# EAGLE board arduino_uno_with_ motor_driver (EAGLE 6.1)
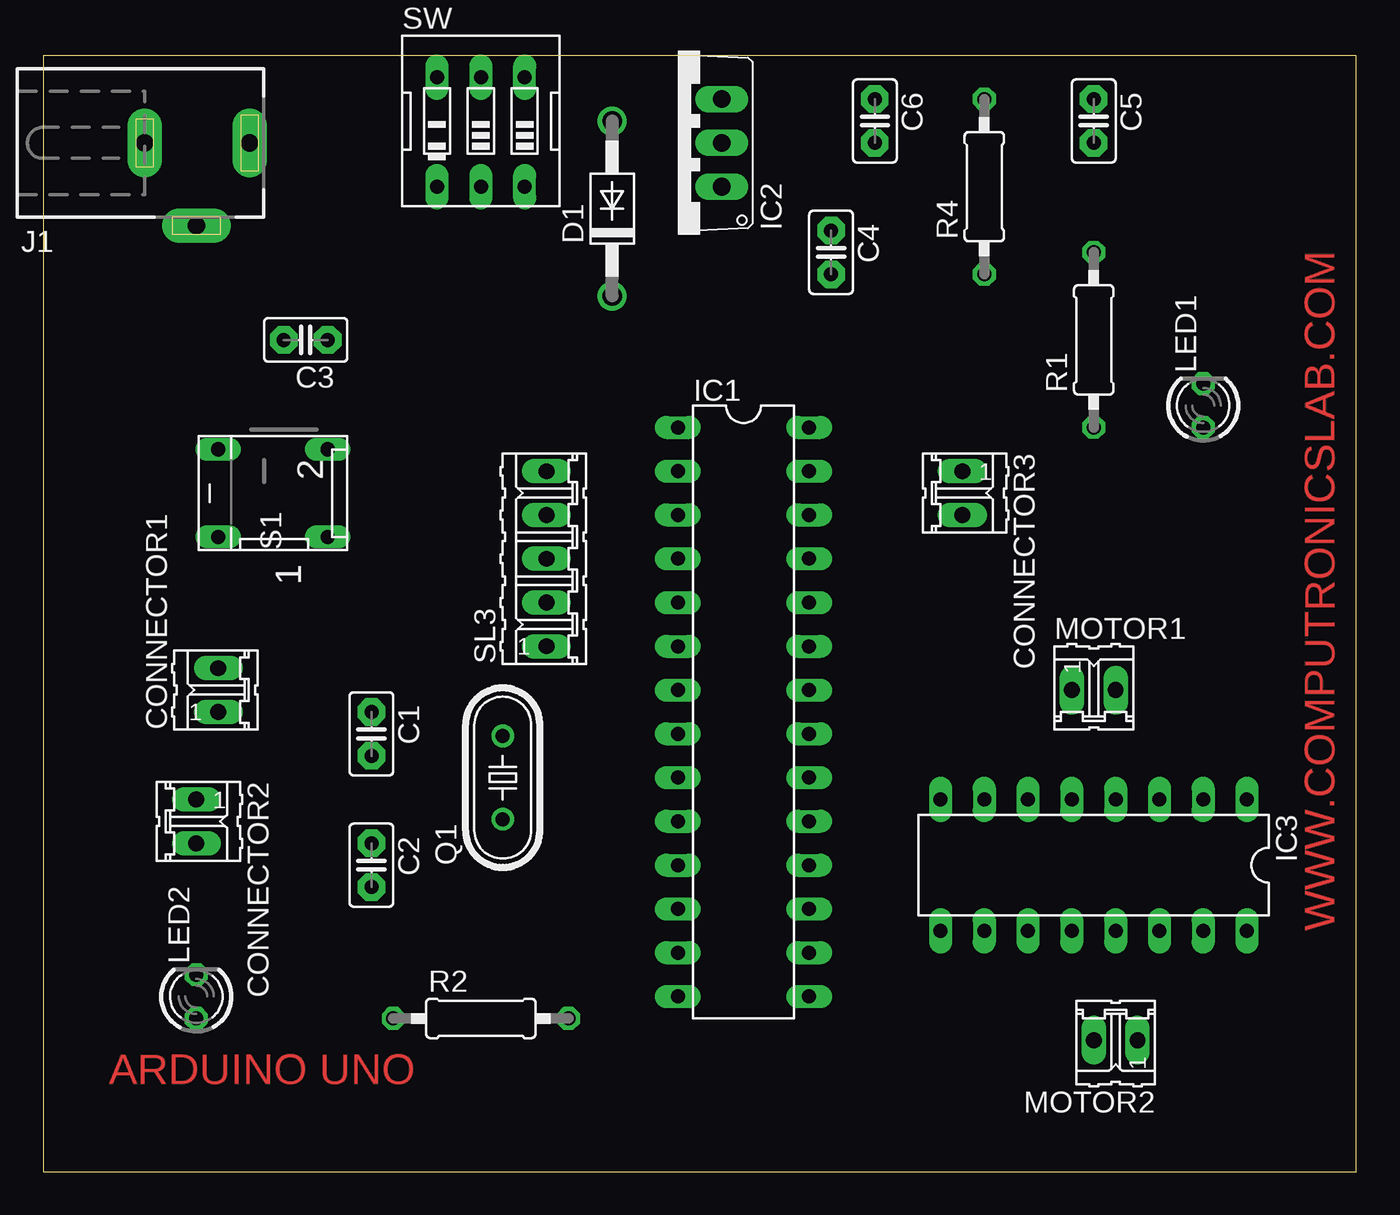
[diagram p0: board, top side]
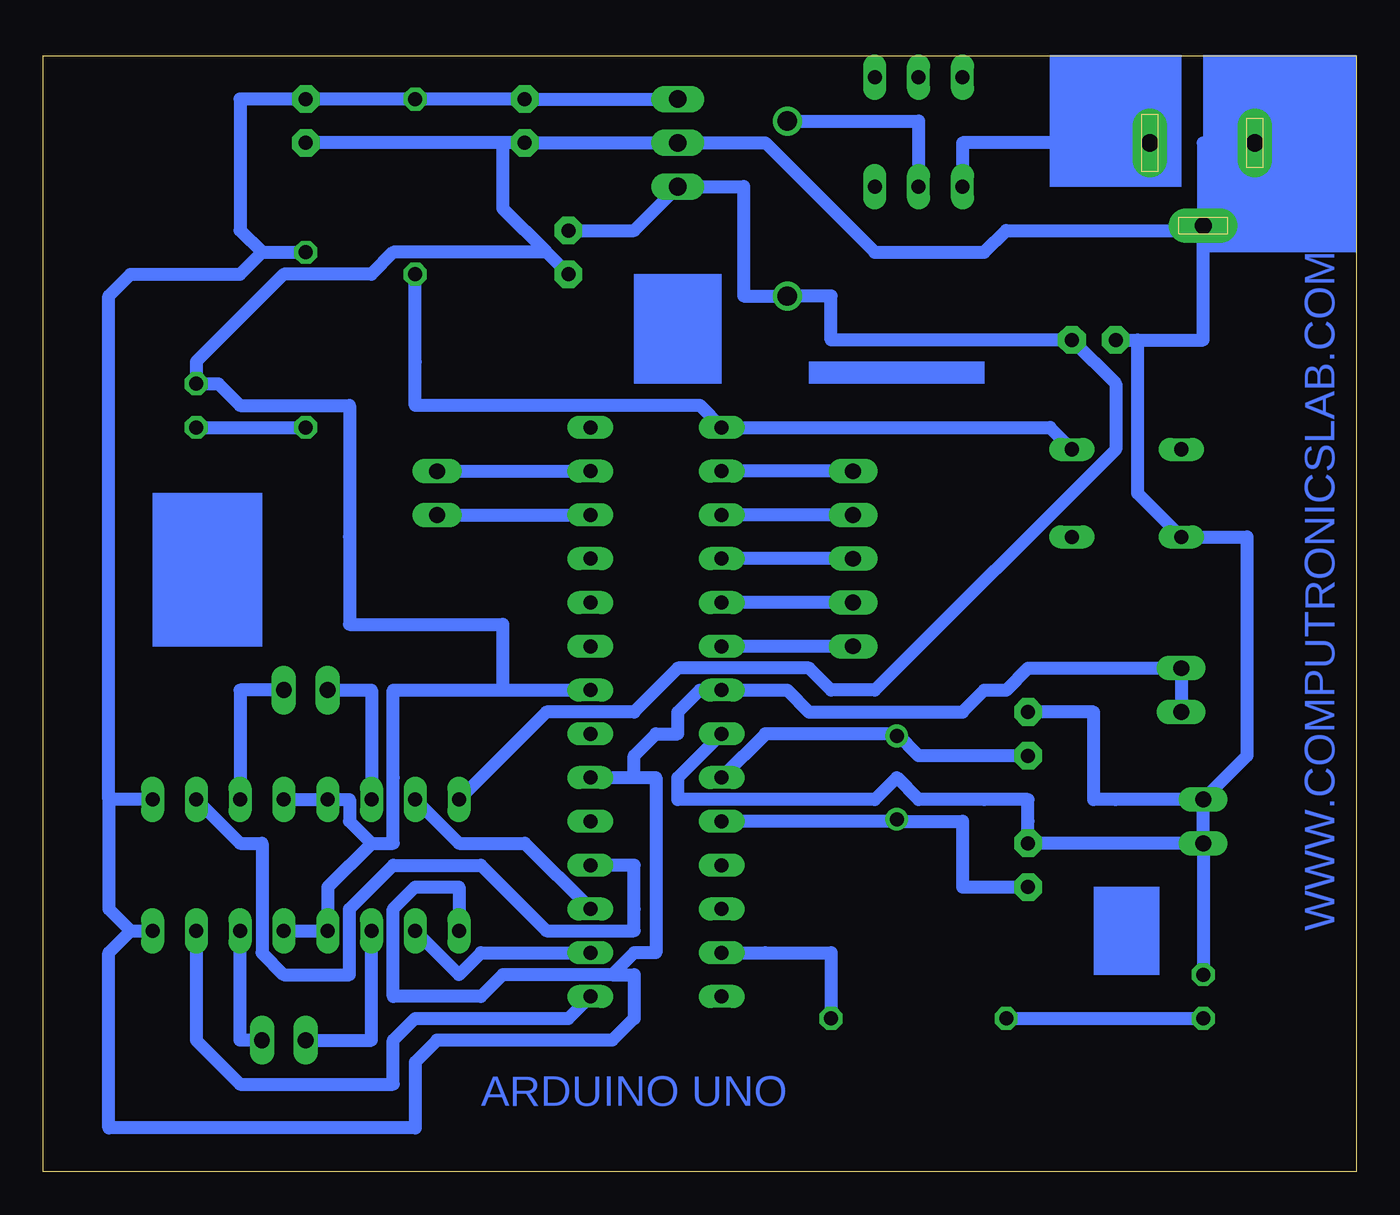
[diagram p1: board, bottom side, seen from below]

Size 76.2 x 64.76 mm. Coordinates in mm from the lower left corner, seen from the top.
Outline: 0,0 76.2,0 76.2,64.76 0,64.76 0,0
Copper layers (1*16): Top 0.035mm / dielectric 1.5mm / Bottom 0.035mm
Design rules: minimum track width 30mil, minimum drill 24mil, track to track 8mil, track to pad 8mil, pad to pad 8mil, via to via 8mil, smd to smd 8mil, copper to edge 40mil, drill to drill 8mil, minimum pad ring 10mil, minimum via ring 8mil, stop-mask expansion 4mil, vias tented up to drill 0mil, thermal gap 10mil

## Footprints (pad centres in the part's own frame; a part is rotated, then mirrored left to right if it is on the bottom)
C2.5-2 = drill 0.813 pad 1.6 octagon: 1 -1.27,0; 2 1.27,0
02P = drill 0.914 long: 1 -1.27,0; 2 1.27,0
DO41-10 = drill 1.118: A 5.08,0; C -5.08,0
DIL28-3 = drill 0.813 long: 1 -16.51,-3.81; 2 -13.97,-3.81; 3 -11.43,-3.81; 4 -8.89,-3.81; 5 -6.35,-3.81; 6 -3.81,-3.81; 7 -1.27,-3.81; 8 1.27,-3.81; 9 3.81,-3.81; 10 6.35,-3.81; 11 8.89,-3.81; 12 11.43,-3.81; 13 13.97,-3.81; 14 16.51,-3.81; 15 16.51,3.81; 16 13.97,3.81; 17 11.43,3.81; 18 8.89,3.81; 19 6.35,3.81; 20 3.81,3.81; 21 1.27,3.81; 22 -1.27,3.81; 23 -3.81,3.81; 24 -6.35,3.81; 25 -8.89,3.81; 26 -11.43,3.81; 27 -13.97,3.81; 28 -16.51,3.81
TO220V = drill 1.016 long: 1 -2.54,-2.54; 2 0,-2.54; 3 2.54,-2.54
DIL16 = drill 0.813 long: 1 -8.89,-3.81; 2 -6.35,-3.81; 3 -3.81,-3.81; 4 -1.27,-3.81; 5 1.27,-3.81; 6 3.81,-3.81; 7 6.35,-3.81; 8 8.89,-3.81; 9 8.89,3.81; 10 6.35,3.81; 11 3.81,3.81; 12 1.27,3.81; 13 -1.27,3.81; 14 -3.81,3.81; 15 -6.35,3.81; 16 -8.89,3.81
DCJ0303 = drill 1 pad 2 long: 1 0,3.1; 2 4.8,0; 3 0,-3
LED3MM = drill 0.813 octagon: A -1.27,0; K 1.27,0
HC49/S = drill 0.813: 1 -2.413,0; 2 2.413,0
0207/10 = drill 0.813 octagon: 1 -5.08,0; 2 5.08,0
DP-02 = drill 0.813 long: 1 -2.54,-2.54; 2 2.54,-2.54; 3 2.54,3.81; 4 -2.54,3.81
05P = drill 0.914 long: 1 -5.08,0; 2 -2.54,0; 3 0,0; 4 2.54,0; 5 5.08,0
EDG-03 = drill 0.813 long: 1 -2.54,-3.81; 2 0,-3.81; 3 2.54,-3.81; 4 2.54,2.54; 5 0,2.54; 6 -2.54,2.54

## Placement (x,y rotation side)
C1  22pf  [C2.5-2]  19.05,25.4 270 top
C2  22pf  [C2.5-2]  19.05,17.78 270 top
C3  100uF  [C2.5-2]  15.24,48.26 180 top
C4  0.1uf  [C2.5-2]  45.72,53.34 270 top
C5  0.1uf  [C2.5-2]  60.96,60.96 270 top
C6  4.7uf  [C2.5-2]  48.26,60.96 270 top
CONNECTOR1  2pin  [02P]  10.16,27.94 90 top
CONNECTOR2  2 pin  [02P]  8.89,20.32 270 top
CONNECTOR3  [02P]  53.34,39.37 270 top
D1  1N4007  [DO41-10]  33.02,55.88 90 top
IC1  ATMEGA328  [DIL28-3]  40.64,26.67 270 top
IC2  7805  [TO220V]  36.83,59.69 90 top
IC3  L293D  [DIL16]  60.96,17.78 180 top
J1  [DCJ0303]  8.89,59.69 270 top
LED1  3mm  [LED3MM]  67.31,44.45 90 top
LED2  3mm  [LED3MM]  8.89,10.16 90 top
MOTOR1  [02P]  60.96,27.94 0 top
MOTOR2  [02P]  62.23,7.62 180 top
Q1  16MHZ  [HC49/S]  26.67,22.86 90 top
R1  220R  [0207/10]  60.96,48.26 90 top
R2  330R  [0207/10]  25.4,8.89 0 top
R4  10K  [0207/10]  54.61,57.15 90 top
S1  push switch  [DP-02]  13.97,39.37 90 top
SL3  5 pin  [05P]  29.21,35.56 90 top
SW  on/of button  [EDG-03]  25.4,60.96 0 top

## Library data of the parts
C1-C6 = capacitor-wima
CONNECTOR1-CONNECTOR3 MOTOR1 MOTOR2 SL3 = con-amp-quick; OC_FARNELL: unknown; OC_NEWARK: unknown
D1 = diode
IC1 = quantum-research-group; OC_FARNELL: unknown; OC_NEWARK: unknown
IC2 = linear
IC3 = st-microelectronics; MPN: L293D; OC_FARNELL: 9589619; OC_NEWARK: 56P8249
J1 = con-jack; OC_FARNELL: unknown; OC_NEWARK: unknown
LED1 LED2 = led
Q1 = crystal; OC_FARNELL: 1667008; OC_NEWARK: unknown
R1 R2 R4 = rcl
S1 = switch-dil; MPN: MCDP02; OC_FARNELL: 1255233; OC_NEWARK: 26M1095
SW = special

## Nets
N$1: C1.2 IC1.9 Q1.2
N$2: C2.2 IC1.10 Q1.1
N$3: J1.1 SW.1
N$4: C3.1 C4.1 D1.C IC2.1 IC3.8
N$5: C1.1 C2.1 C3.2 C4.2 C5.2 C6.2 CONNECTOR2.1 CONNECTOR2.2 IC1.8 IC1.22 IC2.2 IC3.4 IC3.5 IC3.12 IC3.13 J1.2 J1.3 LED1.K LED2.K S1.4
N$6: LED1.A R1.1
N$7: IC1.17 IC3.7
N$8: IC1.6 SL3.1
N$9: IC1.5 SL3.2
N$10: IC1.4 SL3.3
N$11: IC1.3 SL3.4
N$12: CONNECTOR3.1 IC1.27
N$13: CONNECTOR3.2 IC1.26
N$14: IC1.2 SL3.5
N$15: IC1.18 IC3.2
N$16: IC1.15 IC3.15
N$17: IC1.13 R2.2
N$18: D1.A SW.2
N$21: IC1.16 IC3.10
N$25: IC3.14 MOTOR2.1
N$28: IC3.11 MOTOR2.2
N$31: IC1.1 R4.1 S1.2
N$32: LED2.A R2.1
N$33: C5.1 C6.1 CONNECTOR1.1 CONNECTOR1.2 IC1.7 IC1.20 IC2.3 IC3.1 IC3.9 IC3.16 R1.2 R4.2
N$34: IC3.6 MOTOR1.1
N$35: IC3.3 MOTOR1.2

## Tracks (layer width: path | path; a pad name or v marks a point on that pad's centre or on a via)
N$1
  Bottom 0.762: 26.67,25.4 25.4,24.13 C1.2 | IC1.9 34.29,25.4 26.67,25.4 | 26.67,25.4 Q1.2
N$2
  Bottom 0.762: 26.67,20.32 IC1.10 | C2.2 22.86,16.51 22.86,20.32 26.67,20.32 | 26.67,20.32 Q1.1
N$3
  Bottom 0.762: SW.1 22.86,59.69 J1.1
N$4
  Bottom 0.762: C4.1 41.91,54.61 IC2.1 35.56,57.15 35.56,50.8 D1.C 30.48,50.8 30.48,48.26 C3.1 13.97,45.72 13.97,41.91 27.94,27.94 30.48,27.94 31.75,29.21 39.37,29.21 41.91,26.67 46.99,26.67 IC3.8
N$5
  Bottom 0.762: IC1.8 39.37,22.86 39.37,21.59 27.94,21.59 26.67,22.86 25.4,21.59 21.59,21.59 19.05,21.59 19.05,20.32 C2.1 CONNECTOR2.2 | CONNECTOR2.2 LED2.K | CONNECTOR2.2 CONNECTOR2.1 | C1.1 15.24,26.67 15.24,21.59 13.97,21.59 CONNECTOR2.1 | J1.3 8.89,59.69 J1.2 8.89,54.61 | 12.7,48.26 12.7,39.37 S1.4 6.35,36.83 6.35,24.13 CONNECTOR2.1 | C3.2 12.7,48.26 | 8.89,54.61 8.89,48.26 12.7,48.26 | IC3.13 IC3.12 59.69,16.51 57.15,19.05 | IC3.4 IC3.5 58.42,21.59 58.42,20.32 57.15,19.05 | 49.53,27.94 50.8,27.94 55.88,27.94 55.88,22.86 55.88,19.05 57.15,19.05 | 49.53,27.94 IC1.22 | 46.99,53.34 49.53,55.88 49.53,59.69 | 46.99,53.34 C4.2 | 49.53,59.69 C6.2 IC2.2 34.29,59.69 27.94,53.34 21.59,53.34 20.32,54.61 8.89,54.61 | 46.99,53.34 55.88,53.34 57.15,52.07 62.23,52.07 67.31,46.99 LED1.K 66.04,45.72 64.77,44.45 58.42,44.45 58.42,36.83 58.42,31.75 49.53,31.75 49.53,27.94 | 49.53,59.69 C5.2
N$6
  Bottom 0.762: LED1.A R1.1
N$7
  Bottom 0.762: IC1.17 48.26,19.05 52.07,19.05 IC3.7
N$8
  Bottom 0.762: SL3.1 IC1.6
N$9
  Bottom 0.762: SL3.2 IC1.5
N$10
  Bottom 0.762: SL3.3 IC1.4
N$11
  Bottom 0.762: SL3.4 IC1.3
N$12
  Bottom 0.762: CONNECTOR3.1 IC1.27
N$13
  Bottom 0.762: CONNECTOR3.2 IC1.26
N$14
  Bottom 0.762: SL3.5 IC1.2
N$15
  Bottom 0.762: IC1.18 41.91,17.78 41.91,15.24 41.91,13.97 46.99,13.97 50.8,17.78 55.88,17.78 58.42,15.24 58.42,11.43 62.23,11.43 63.5,12.7 63.5,19.05 64.77,19.05 IC3.2
N$16
  Bottom 0.762: IC1.15 45.72,8.89 54.61,8.89 55.88,7.62 55.88,5.08 64.77,5.08 67.31,7.62 IC3.15
N$17
  Bottom 0.762: R2.2 30.48,11.43 30.48,12.7 34.29,12.7 IC1.13
N$18
  Bottom 0.762: SW.2 25.4,60.96 D1.A
N$21
  Bottom 0.762: IC1.16 50.8,12.7 52.07,11.43 IC3.10
N$25
  Bottom 0.762: IC3.14 64.77,7.62 MOTOR2.1
N$28
  Bottom 0.762: IC3.11 57.15,7.62 MOTOR2.2
N$31
  Bottom 0.762: S1.2 17.78,43.18 IC1.1 38.1,44.45 46.99,44.45 54.61,44.45 54.61,46.99 R4.1
N$32
  Bottom 0.762: R2.1 LED2.A
N$33
  Bottom 0.762: 63.5,53.34 R1.2 | 63.5,53.34 64.77,54.61 64.77,62.23 C5.1 R4.2 C6.1 IC2.3 | 71.12,13.97 IC3.16 | 71.12,13.97 72.39,15.24 72.39,21.59 | IC3.1 72.39,21.59 | CONNECTOR1.1 CONNECTOR1.2 19.05,29.21 20.32,27.94 21.59,27.94 22.86,26.67 31.75,26.67 33.02,27.94 IC1.7 38.1,27.94 39.37,26.67 39.37,25.4 40.64,25.4 41.91,24.13 41.91,22.86 | IC1.20 41.91,22.86 | IC3.9 52.07,16.51 54.61,16.51 55.88,15.24 55.88,10.16 50.8,10.16 49.53,11.43 43.18,11.43 | 43.18,11.43 41.91,12.7 40.64,12.7 40.64,22.86 41.91,22.86 | 71.12,13.97 72.39,12.7 72.39,2.54 54.61,2.54 54.61,6.35 53.34,7.62 43.18,7.62 41.91,8.89 41.91,11.43 43.18,11.43 | 63.5,53.34 64.77,52.07 71.12,52.07 72.39,50.8 72.39,21.59
N$34
  Bottom 0.762: IC3.6 57.15,27.94 MOTOR1.1
N$35
  Bottom 0.762: IC3.3 64.77,27.94 MOTOR1.2
(copper drawn outside any net)
  shapes: Bottom area x6

## Text on the board
Top: WWW.COMPUTRONICSLAB.COM | ARDUINO UNO
Bottom: WWW.COMPUTRONICSLAB.COM | ARDUINO UNO